# Altium PCB PCB.PcbDoc
Units mm, origin at the board's own origin, x right, y up, seen from the top; angles counter-clockwise.
Board outline 132.08 x 40.64 mm, 2 copper layers (Top Layer, Bottom Layer); 49 components, 41 nets, 131 pads, 33 vias.
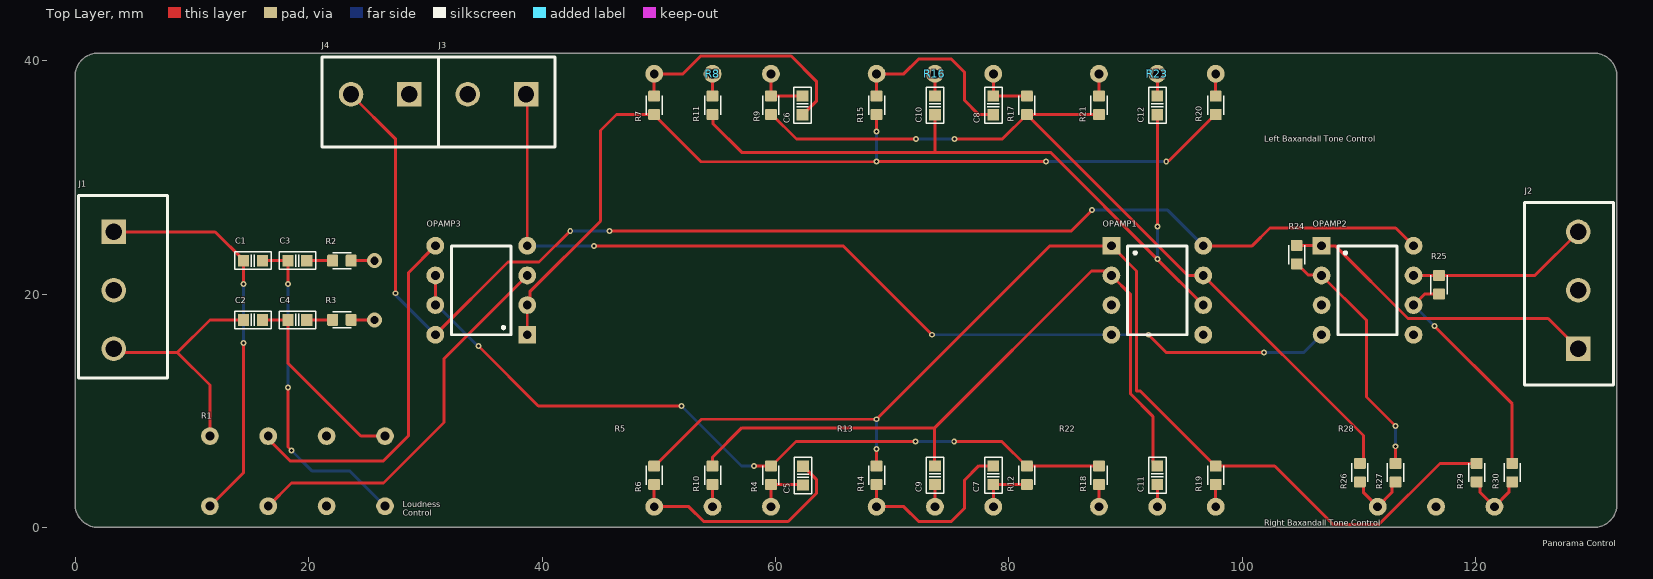
[diagram p0: Top Layer view]
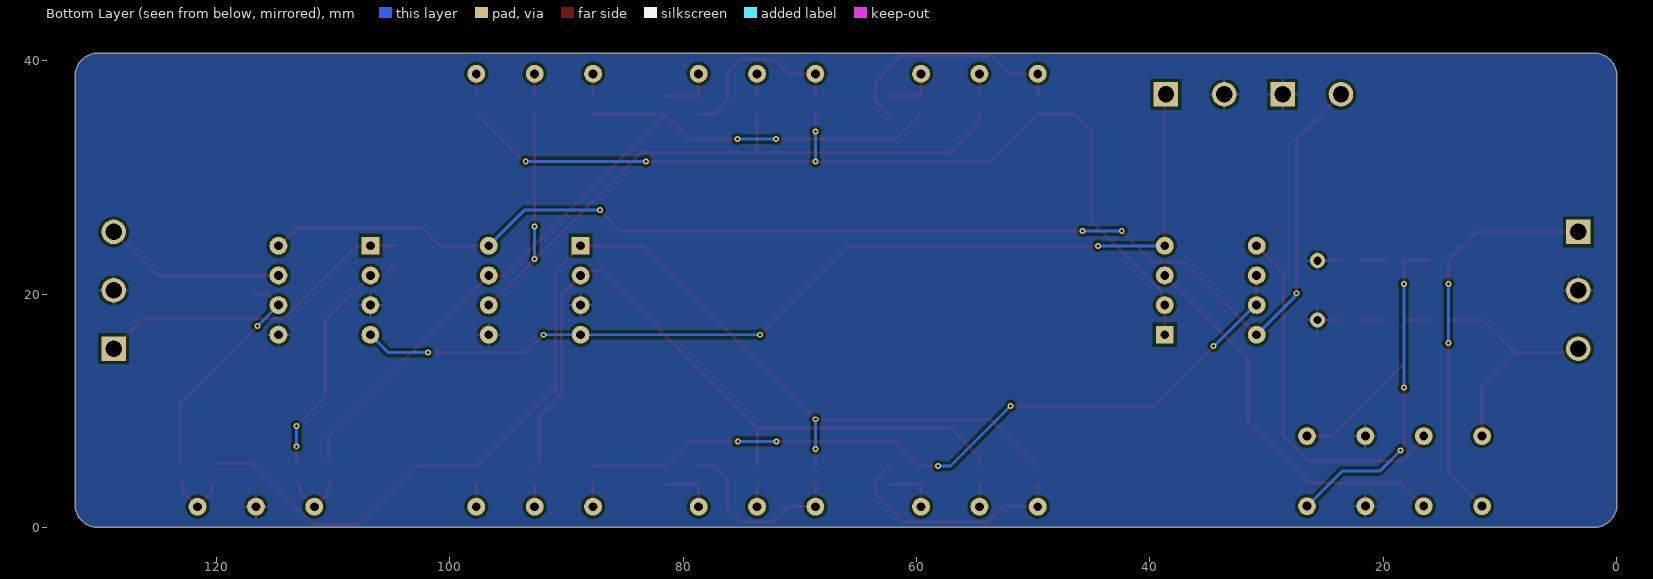
[diagram p1: Bottom Layer view, seen from below]
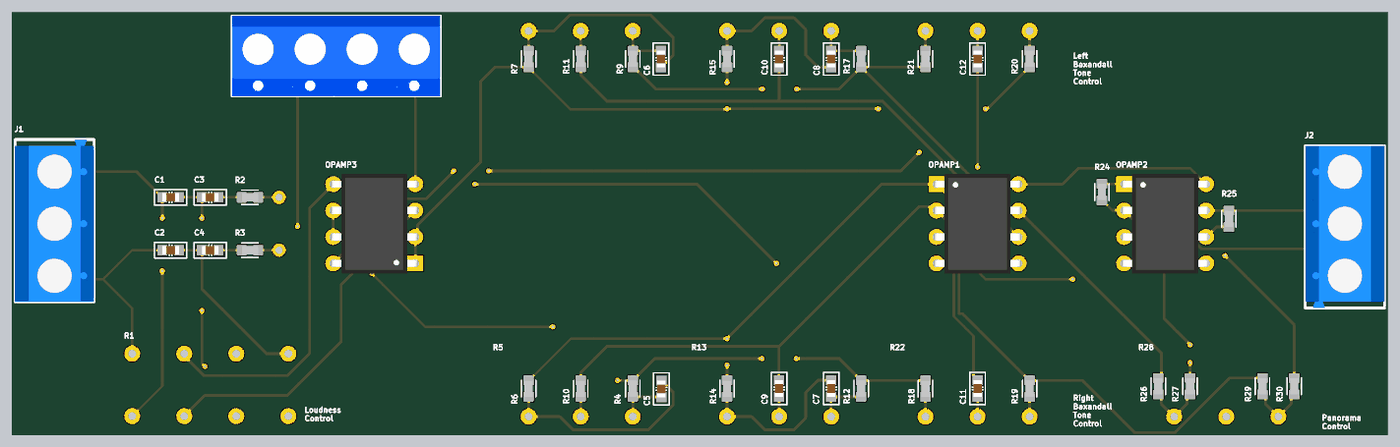
[diagram p2: 3D render of the assembled board from above, using the file's embedded part models]

## Layer stack, top to bottom
Top Solder: solder mask 0.0102, Solder Resist, Dk 3.5
Top Layer: signal copper 0.0356
Dielectric 1: dielectric 0.32, FR-4, Dk 4.8
Bottom Layer: signal copper 0.0356
Bottom Solder: solder mask 0.0102, Solder Resist, Dk 3.5

## Board outline
0,2 0,38.64 cw(c2,38.64) 2,40.64 129.953,40.64 130.08,40.64 cw(c130.08,38.64) 132.08,38.64 132.08,2 cw(c130.08,2) 130.08,0 2,0 cw(c2,2)

## Design rules (kind name [scope] priority, off if disabled: settings)
Clearance [All] p1: gap=0.254 ignorepadtopadclearanceinfootprint=FALSE
PolygonConnect [All] p1: connectstyle=Relief reliefconductorwidth=0.254 reliefentries=4 polygonreliefangle="90 Angle" airgapwidth=0.254
RoutingVias [All] p1: holewidth=0.711 width=1.27 viastyle="Through Hole" minholewidth=0.711 minwidth=1.27 maxholewidth=0.711 maxwidth=1.27
SilkToSilkClearance [All] p1: silktosilkclearance=0.15
SilkToSolderMaskClearance [IsPad] p1: minsilkscreentomaskgap=0.09 clearancetoexposedcopper=TRUE
SolderMaskExpansion [All] p1: expansion=0.102 istentingtop=FALSE
SupplyNets "Schematic Supply Nets_2" [InNet('-VCC')] p1: voltage=0.000
SupplyNets "Schematic Supply Nets_1" [InNet('GND')] p2: voltage=0.000
SupplyNets "Schematic Supply Nets" [InNet('VCC')] p3: voltage=0.000
Width [All] p1: maxlimit=0.254 minlimit=0.254 preferedwidth=0.254
28 further rules are at their usual default settings.

## Classes and differential pairs
component class SCH3: OPAMP2 R24 R25 R26 R27 R28 R29 R30
component class SCH1: C1 C2 C3 C4 OPAMP3 R1 R2 R3
component class Schematic: J1 J2 J3 J4
component class SCH2: C5 C6 C7 C8 C9 C10 C11 C12 OPAMP1 R4 R5 R6 R7 R8 R9 R10 R11 R12 R13 R14 R15 R16 R17 R18 R19 R20 R21 R22 R23

## Components (designator, comment, footprint, x,y, rotation, side; value= is the part's Value field where it differs from the comment)
C1 "220p" CERAMIC0603 15.24,22.86 r180 top
C2 "220p" CERAMIC0603 15.24,17.78 r180 top
C3 "47n" CERAMIC0603 19.05,22.86 r180 top
C4 "47n" CERAMIC0603 19.05,17.78 r180 top
C5 "100n" CERAMIC0603 62.357,4.445 r90 top
C6 "100n" CERAMIC0603 62.319,36.157 r90 top
C7 "4.7n" CERAMIC0603 78.66,4.483 r90 top
C8 "4.7n" CERAMIC0603 78.66,36.157 r90 top
C9 "22n" CERAMIC0603 73.66,4.483 r270 top
C10 "22n" CERAMIC0603 73.66,36.157 r90 top
C11 "3.9n" CERAMIC0603 92.71,4.483 r270 top
C12 "3.9n" CERAMIC0603 92.71,36.157 r90 top
J1 "Borne KF301-3P" "Borne KF301-3P" 3.302,20.32 r270 top
J2 "Borne KF301-3P" "Borne KF301-3P" 128.778,20.32 r90 top
J3 "Borne KF301-2P" "Borne KF301-2P" 36.132,36.449 r180 top
J4 "Borne KF301-2P" "Borne KF301-2P" 26.139,36.449 r180 top
OPAMP1 "TL072" DIP8 92.71,20.32 r0 top
OPAMP2 "TL072" DIP8 110.717,20.32 r0 top
OPAMP3 "TL072" DIP8 34.798,20.32 r180 top
R1 "WH148 - 100k" WH148 19.05,4.826 r0 top
R2 "6.8k" RES0603 22.86,22.86 r180 top
R3 "6.8k" RES0603 22.86,17.78 r180 top
R4 "12k" RES0603 59.61,4.473 r270 top
R5 "100k" "Potentiometer THT" 54.61,1.778 r0 top
R6 "12k" RES0603 49.61,4.473 r90 top
R7 "12k" RES0603 49.61,36.167 r90 top
R8 "100k" "Potentiometer THT" 54.61,38.862 r180 top
R9 "12k" RES0603 59.61,36.167 r270 top
R10 "12k" RES0603 54.61,4.473 r90 top
R11 "12k" RES0603 54.61,36.167 r270 top
R12 "3.9k" RES0603 81.534,4.473 r270 top
R13 "100k" "Potentiometer THT" 73.66,1.778 r0 top
R14 "3.9k" RES0603 68.66,4.473 r90 top
R15 "3.9k" RES0603 68.66,36.167 r90 top
R16 "100k" "Potentiometer THT" 73.66,38.862 r180 top
R17 "3.9k" RES0603 81.534,36.167 r270 top
R18 "3.9k" RES0603 87.71,4.473 r90 top
R19 "3.9k" RES0603 97.71,4.473 r270 top
R20 "3.9k" RES0603 97.71,36.167 r270 top
R21 "3.9k" RES0603 87.71,36.167 r90 top
R22 "500k" "Potentiometer THT" 92.71,1.778 r0 top
R23 "500k" "Potentiometer THT" 92.71,38.862 r180 top
R24 "22k" RES0603 104.648,23.368 r270 top
R25 "22k" RES0603 116.84,20.8 r270 top
R26 "7.5k" RES0603 110.062,4.699 r270 top
R27 "7.5k" RES0603 113.11,4.699 r90 top
R28 "5k" "Potentiometer THT" 116.586,1.778 r0 top
R29 "7.5k" RES0603 120.062,4.699 r270 top
R30 "7.5k" RES0603 123.11,4.699 r90 top

## Footprints (in the part's own frame and the unit in brackets; to place one, negate y for a bottom-side part, rotate by r counter-clockwise, add the part's x,y. Pads: shape width x height; smd on the part's side, far side on the other; paste and mask are expansions set on the pad)
"Borne KF301-2P" [mm]
  rect 2.1x2.1 hole 1.4: 1(-2.5,-0.65)
  round 2.1 hole 1.4: 2(2.5,-0.65)
  silkscreen extent -5,-3.85 5,3.85, body extent -5,-3.85 5,3.85, height 10
"Borne KF301-3P" [mm]
  rect 2.1x2.1 hole 1.4: 1(-5,0)
  round 2.1 hole 1.4: 2(0,0) 3(5,0)
  silkscreen extent -8.1,-3 7.5,4.6, body extent -8.1,-3 7.5,4.6, height 10
CERAMIC0603 [mm]
  rect 0.95x1 smd: 1(-0.8,0) 2(0.8,0)
  silkscreen extent -1.55,-0.75 1.55,0.75, body extent -0.8,-0.4 0.8,0.4, height 0.8
DIP8 [mil]
  rect 60x60 hole 30: 1(-155,150)
  round 60 hole 30: 2(-155,50) 3(-155,-50) 4(-155,-150) 5(155,-150) 6(155,-50) 7(155,50) 8(155,150)
  silkscreen extent -100,-150 100,150, body extent -164,-189 164,189, height 200
"Potentiometer THT" [mil]
  round 60 hole 30: 1(-196.85,0) 2(196.85,0) 3(0,0)
  body extent -335,-705 335,228, height 827
RES0603 [mm]
  rrect20% 0.94x1.02 smd: 1(-0.79,0) 2(0.79,0)
  silkscreen extent -0.8,-0.69 0.8,0.69, body extent -0.81,-0.4 0.79,0.4, height 0.45
WH148 [mil]
  round 60 hole 30: 1(-295.28,118.11) 2(-98.43,118.11) 3(98.43,118.11) 4(295.28,118.11) 5(-295.28,-118.11) 6(-98.43,-118.11) 7(98.43,-118.11) 8(295.28,-118.11)

## Part data
C1 C2 C3 C4 C5 C6 C7 C8 C9 C10 C11 C12: library part Cap, Package=None, Availability="In Stock", Check_prices=https://www.snapeda.com/parts/TAJC226M025RNJ/KEMET/view-part/?ref=eda, MF=KEMET, MP=TAJC226M025RNJ, Price=None, Purchase-URL=https://pricing.snapeda.com/search/part/TAJC226M025RNJ/?ref=eda, SnapEDA_Link=https://www.snapeda.com/parts/TAJC226M025RNJ/KEMET/view-part/?ref=snap
J3 J4: "2 Pin Terminal Block 5mm Pitch", Package=None, Availability=Unavailable, MP=KF301-2P, Price=None
R1: library part WH148
R2 R3 R4 R6 R7 R9 R10 R11 R12 R14 R15 R17 R18 R19 R20 R21 R24 R25 R26 R27 R29 R30: library part "RESISTOR SMD", Package=None, Availability=Unavailable, MP=3-1879460-6, Price=None
R5 R8 R13 R16 R22 R23 R28: library part Potentiometer

## Via types
v1: diameter 0.508, hole 0.254, Top Layer to Bottom Layer, 31 vias
v2: diameter 1.27, hole 0.711, Top Layer to Bottom Layer, 2 vias

## Nets (pads, with @x,y where several pads share a name; then routed paths per layer and width w, separated by ;. In a path a pad name is that pad's centre, name@x,y a point inside that pad or via, vN(x,y) a via of type N, cw(c..) or ccw(c..) an arc to the next point about the centre after c; other vN are vias at no path point)
-VCC: J3.1 OPAMP1.4 OPAMP2.4 OPAMP3.4 | length 85.5
  Top Layer w0.254: J3.1 38.735,36.996 OPAMP3.4 ; v1(44.45,24.13) 65.786,24.13 v1(73.406,16.51) ; v1(91.948,16.51) 93.472,14.986 v1(101.854,14.986)
  Bottom Layer w0.254: OPAMP3.4 v1(44.45,24.13) ; v1(73.406,16.51) OPAMP1.4 v1(91.948,16.51) ; v1(101.854,14.986) 105.256,14.986 OPAMP2.4
Baxandall_Left_Output: OPAMP1.7 R9.2 R17.2 R21.1 R26.1 | length 72.5
  Top Layer w0.254: R9.2@59.69,35.377 61.793,33.274 v1(72.049,33.274) ; v1(75.351,33.274) 79.431,33.274 R17.2 ; R21.1 R17.2 ; R26.1 110.363,5.79 110.363,7.874 OPAMP1.7 95.321,21.59 81.917,34.994 81.917,35.034 81.574,35.377 R17.2
  Bottom Layer w0.254: v1(72.049,33.274) v1(75.351,33.274)
Baxandall_Right_Output: OPAMP1.1 R6.2 R14.2 R19.1 R29.1 | length 100.4
  Top Layer w0.254: R6.2 49.65,5.263 53.658,9.271 v1(68.66,9.271) 83.519,24.13 OPAMP1.1 90.932,21.971 90.932,11.684 91.249,11.684 97.67,5.263 R19.1 102.762,5.263 107.771,0.254 111.678,0.254 116.913,5.489 R29.1 ; R14.2 v1(68.66,6.731)
  Bottom Layer w0.254: v1(68.66,6.731) v1(68.66,9.271)
GND: J1.2 J2.2 J3.2 J4.1 OPAMP1.3 OPAMP1.5 OPAMP2.3 OPAMP2.5 R1.3 R1.7 R2.1 R3.1 R28.3 | length 4
  Top Layer w0.254: R3.1 v2(25.654,17.78) ; R2.1 v2(25.654,22.86)
Left_Side_Tap: C1.1 C3.2 R1.8 | length 28.6
  Top Layer w0.254: C1.1 C3.2 v1(18.25,20.856) ; v1(18.25,11.976) 18.25,6.896 v1(18.542,6.604)
  Bottom Layer w0.254: v1(18.25,11.976) v1(18.25,20.856) ; v1(18.542,6.604) 20.32,4.826 23.55,4.826 R1.8
Loudness_Left_Buffer: OPAMP3.3 R1.6 | length 33.6
  Top Layer w0.254: R1.6 18.534,3.81 26.416,3.81 31.607,9.001 31.607,14.462 OPAMP3.3
Loudness_Left_Input: C1.2 J1.1 R1.5 | length 34.4
  Top Layer w0.254: J1.1 12.005,25.32 14.44,22.885 C1.2 v1(14.44,20.856) ; R1.5 14.44,4.716 v1(14.44,15.786)
  Bottom Layer w0.254: v1(14.44,15.786) v1(14.44,20.856)
Loudness_Right_Buffer: OPAMP3.5 R1.2 | length 31.1
  Top Layer w0.254: R1.2 16.55,7.58 18.415,5.715 26.416,5.715 28.58,7.879 28.58,21.849 OPAMP3.5
Loudness_Right_Input: C2.2 J1.3 R1.1 | length 20.7
  Top Layer w0.254: J1.3 3.636,14.986 8.763,14.986 ; R1.1 11.55,12.199 8.763,14.986 ; C2.2 11.557,17.78 8.763,14.986
Negative_Left_Input: C10.1 C12.1 OPAMP1.6 R11.2 | length 64.8
  Top Layer w0.254: R11.2@54.635,35.377 54.635,34.615 57.144,32.106 73.66,32.106 ; C10.1 73.66,32.106 ; v1(92.71,25.781) C12.1 ; OPAMP1.6 v1(92.71,22.987) 83.591,32.106 73.66,32.106
  Bottom Layer w0.254: v1(92.71,22.987) v1(92.71,25.781)
Negative_Right_Input: C9.1 C11.1 OPAMP1.2 R10.2 | length 62.9
  Top Layer w0.254: R10.2 54.61,6.025 57.119,8.534 73.635,8.534 ; C9.1@73.635,5.283 73.635,8.534 ; C11.1 92.327,5.666 92.327,9.523 90.424,11.426 90.424,19.939 OPAMP1.2 88.394,21.969 87.07,21.969 73.635,8.534
NetC3_1: C3.1 R2.2 | length 2.2
  Top Layer w0.254: C3.1 R2.2
NetC4_1: C4.1 R3.2 | length 2.2
  Top Layer w0.254: C4.1 R3.2
NetC5_1: C5.1 R4.2 R5.2 | length 4.7
  Top Layer w0.254: R5.2 R4.2 62.319,3.683 C5.1
NetC5_2: C5.2 R5.1 R6.1 | length 20.1
  Top Layer w0.254: R6.1@49.61,3.683 R5.1 52.578,1.778 53.848,0.508 61.087,0.508 63.5,2.921 63.5,4.127 62.382,5.245 C5.2
NetC6_1: C6.1 R7.2 R8.2 | length 20.7
  Top Layer w0.254: R7.2 R8.2 52.07,38.862 53.594,40.386 61.341,40.386 63.5,38.227 63.5,36.513 62.344,35.357 C6.1
NetC6_2: C6.2 R8.1 R9.1 | length 4.6
  Top Layer w0.254: R8.1 R9.1 C6.2
NetC7_1: C7.1 R12.2 R13.2 | length 4.8
  Top Layer w0.254: R13.2 C7.1 R12.2
NetC7_2: C7.2 R13.1 R14.1 | length 15.8
  Top Layer w0.254: R14.1 R13.1 70.997,1.778 72.267,0.508 75.057,0.508 76.21,1.661 76.21,4.074 77.419,5.283 C7.2
NetC8_1: C8.1 R15.2 R16.2 | length 15.8
  Top Layer w0.254: R15.2 R16.2 70.997,38.862 72.267,40.132 75.057,40.132 76.21,38.979 76.21,36.566 77.419,35.357 C8.1
NetC8_2: C8.2 R16.1 R17.1 | length 4.8
  Top Layer w0.254: R16.1 C8.2 R17.1
NetC9_2: C9.2 R13.3 | length 1.9
  Top Layer w0.254: R13.3 C9.2
NetC10_2: C10.2 R16.3 | length 1.9
  Top Layer w0.254: C10.2 R16.3
NetC11_2: C11.2 R22.3 | length 1.9
  Top Layer w0.254: R22.3 C11.2
NetC12_2: C12.2 R23.3 | length 1.9
  Top Layer w0.254: C12.2 R23.3
NetJ2_1: J2.1 OPAMP2.1 R24.1 | length 27.8
  Top Layer w0.254: R24.1 106.752,24.158 OPAMP2.1 107.958,24.13 114.181,17.907 126.191,17.907 J2.1
NetJ2_3: J2.3 OPAMP2.7 R25.1 | length 15.7
  Top Layer w0.254: OPAMP2.7 R25.1 125.048,21.59 J2.3
NetOPAMP3_1: OPAMP3.1 OPAMP3.2 R7.1 R15.1 R20.2 | length 80.7
  Top Layer w0.254: OPAMP3.1 OPAMP3.2 38.954,19.269 38.954,20.193 45,26.239 45,34 46.377,35.377 R7.1 ; R7.1@49.61,35.337 53.618,31.329 v1@68.62,31.329 ; v1(68.66,31.369) v1(83.185,31.369) ; v1(68.66,33.909) R15.1 ; v1(93.472,31.369) 93.521,31.418 93.711,31.418 97.67,35.377 R20.2
  Bottom Layer w0.254: v1(68.66,31.369) v1(68.66,33.909) ; v1(83.185,31.369) v1(93.472,31.369)
NetOPAMP3_6: OPAMP3.6 OPAMP3.7 R4.1 R12.1 R18.2 | length 66.8
  Top Layer w0.254: OPAMP3.7 OPAMP3.6 ; v1(34.558,15.541) 39.686,10.414 v1(51.943,10.414) ; v1(58.142,5.263) R4.1 59.65,5.263 61.753,7.366 v1(72.009,7.366) ; v1(75.311,7.366) 79.391,7.366 81.494,5.263 R12.1 R18.2
  Bottom Layer w0.254: OPAMP3.7 30.988,19.05 v1@34.544,15.494 ; v1(51.943,10.414) 57.094,5.263 v1(58.142,5.263) ; v1(72.009,7.366) v1(75.311,7.366)
NetR5_3: R5.3 R10.1 | length 1.9
  Top Layer w0.254: R5.3 R10.1
NetR8_3: R8.3 R11.1 | length 1.9
  Top Layer w0.254: R11.1 R8.3
NetR18_1: R18.1 R22.1 | length 1.9
  Top Layer w0.254: R22.1 R18.1
NetR19_2: R19.2 R22.2 | length 1.9
  Top Layer w0.254: R22.2 R19.2
NetR20_1: R20.1 R23.1 | length 1.9
  Top Layer w0.254: R20.1 R23.1
NetR21_2: R21.2 R23.2 | length 1.9
  Top Layer w0.254: R21.2 R23.2
NetR26_2: R26.2 R27.1 R28.1 | length 5.5
  Top Layer w0.254: R26.2 110.351,3.62 110.351,3.013 R28.1 112.821,3.013 112.821,3.62 R27.1
NetR28_2: R28.2 R29.2 R30.1 | length 5.5
  Top Layer w0.254: R29.2@120.062,3.909 120.351,3.62 120.351,3.013 R28.2 122.821,3.013 122.821,3.62 R30.1@123.11,3.909
Panorama_Neg_Left_Input: OPAMP2.2 R24.2 R27.2 | length 21.3
  Top Layer w0.254: R24.2 104.688,22.578 105.637,21.629 106.742,21.629 OPAMP2.2 110.617,17.753 110.617,11.176 v1(113.11,8.683) ; R27.2 v1(113.11,6.957)
  Bottom Layer w0.254: v1(113.11,6.957) v1(113.11,8.683)
Panorama_Neg_Right_Input: OPAMP2.6 R25.2 R30.2 | length 19.6
  Top Layer w0.254: OPAMP2.6 115.614,20.01 R25.2 ; v1(116.459,17.245) 123.11,10.594 R30.2
  Bottom Layer w0.254: OPAMP2.6 v1(116.459,17.245)
Right_Side_Tap: C2.1 C4.2 R1.4 | length 16.8
  Top Layer w0.254: C2.1 C4.2 18.25,14.059 24.483,7.826 R1.4
VCC: J4.2 OPAMP1.8 OPAMP2.8 OPAMP3.8 | length 114.3
  Top Layer w0.254: J4.2 27.432,33.306 v1(27.432,20.066) ; OPAMP3.8 37.084,22.733 39.751,22.733 v1(42.418,25.4) ; v1(45.777,25.4) 85.344,25.4 v1(87.122,27.178) ; OPAMP1.8 100.838,24.13 102.362,25.654 113.13,25.654 OPAMP2.8
  Bottom Layer w0.254: v1(27.432,20.066) 27.481,20.017 27.481,19.89 OPAMP3.8 ; v1(42.418,25.4) v1(45.777,25.4) ; v1(87.122,27.178) 93.599,27.178 OPAMP1.8

## Polygon pours and split planes (outlines as drawn)
GND on Bottom Layer "NONET_L01_P-001" (solid, pour order 0): 0,2 0,38.64 cw(c2,38.64) 2,40.64 129.953,40.64 130.08,40.64 cw(c130.08,38.64) 132.08,38.64 132.08,2 cw(c130.08,2) 130.08,0 2,0 cw(c2,2)

## Silkscreen, mask and mechanical layers (free items; w line width, h text height)
Top Overlay:
  text "Left Baxandall Tone Control" at 101.854,33.029 h0.51
  text "Loudness  / Control" at 28.067,0.991 h0.51
  text "Right Baxandall Tone Control" at 101.854,0.136 h0.51
  text "Panorama Control" at 125.73,-1.599 h0.51
Mechanical 1:
  lines w0.254: 0,20.32 3.302,20.32 ; 129.953,40.64 2,40.64 ccw(c2,38.64) 0,38.64 0,2 ccw(c2,2) 2,0 130.08,0 ccw(c130.08,2) 132.08,2 132.08,38.64 ccw(c130.08,38.64) 130.08,40.64